# Altium PCB PCB.PcbDoc
Units mm, origin at the board's own origin, x right, y up, seen from the top; angles counter-clockwise.
Board outline 48.26 x 35.69 mm, 2 copper layers (Top Layer, Bottom Layer); 8 components, 6 nets, 21 pads, 0 vias.
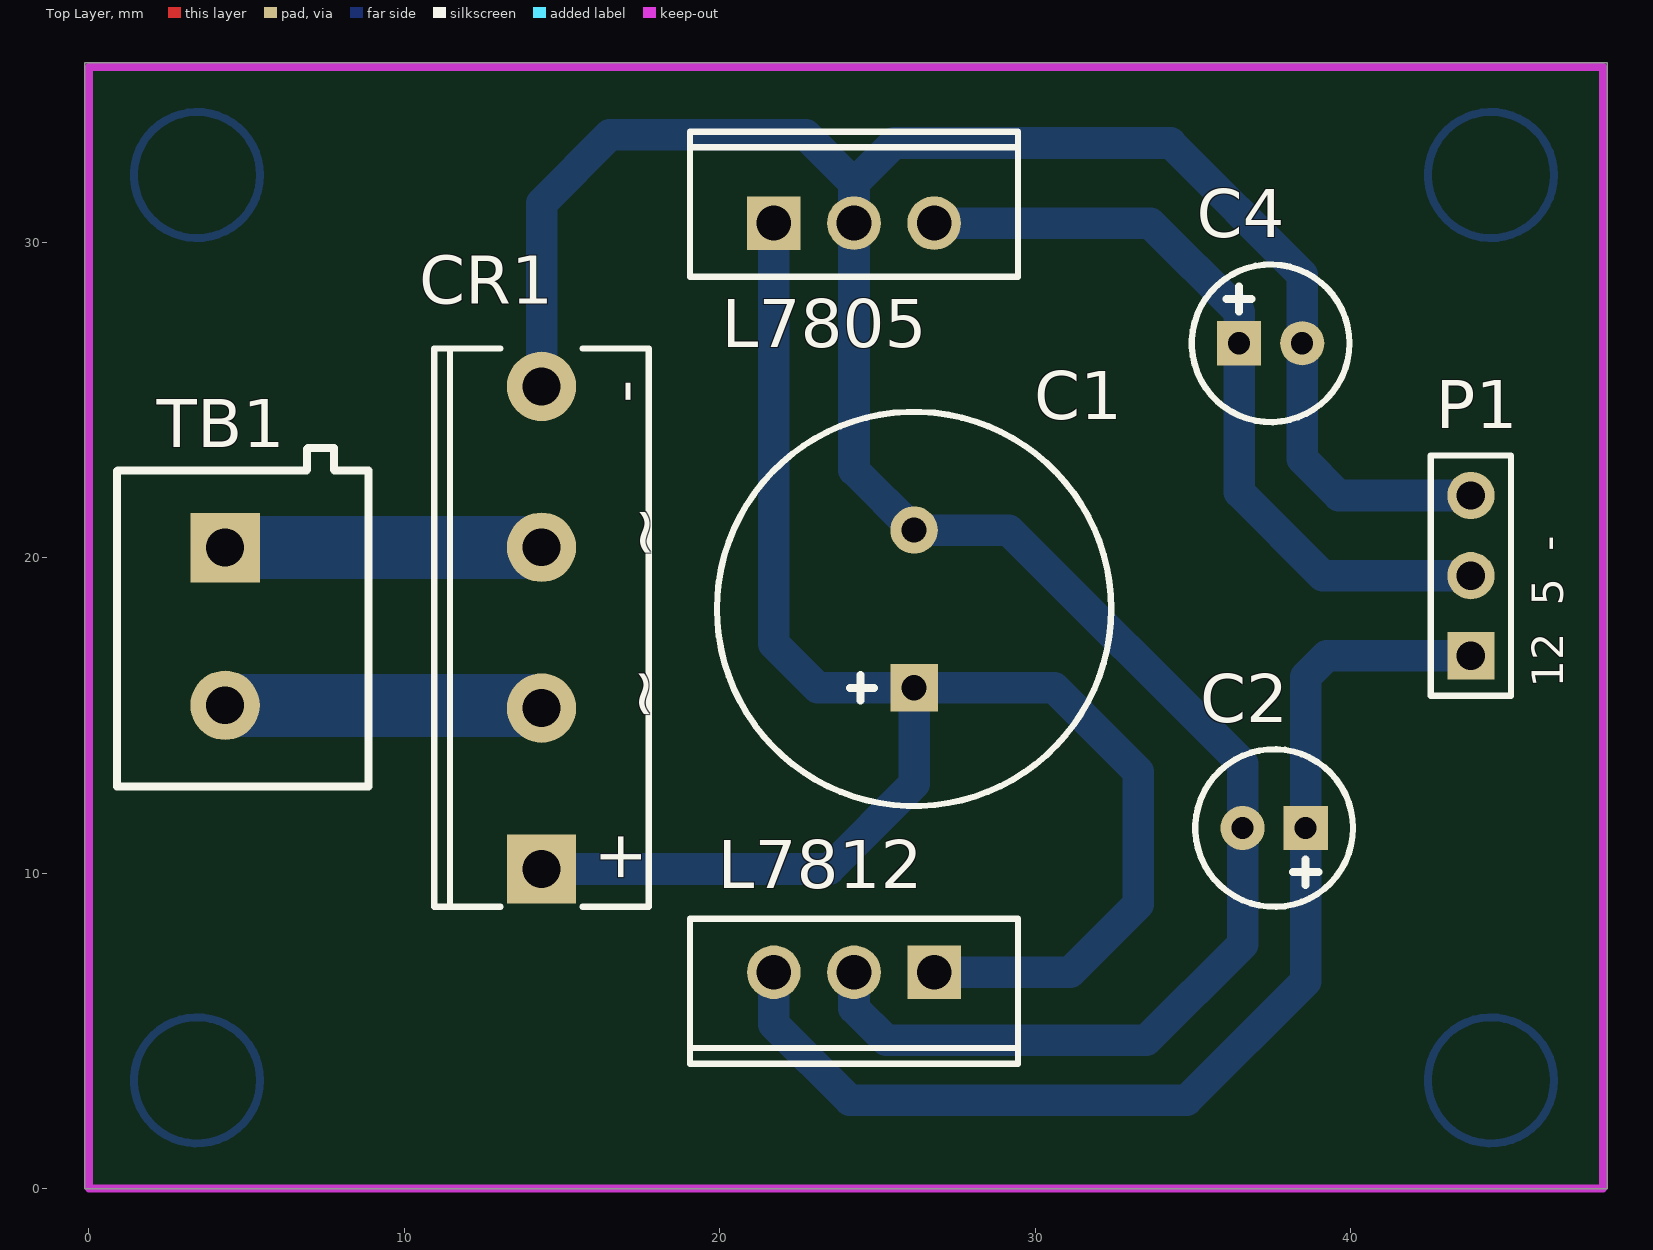
[diagram p0: Top Layer view]
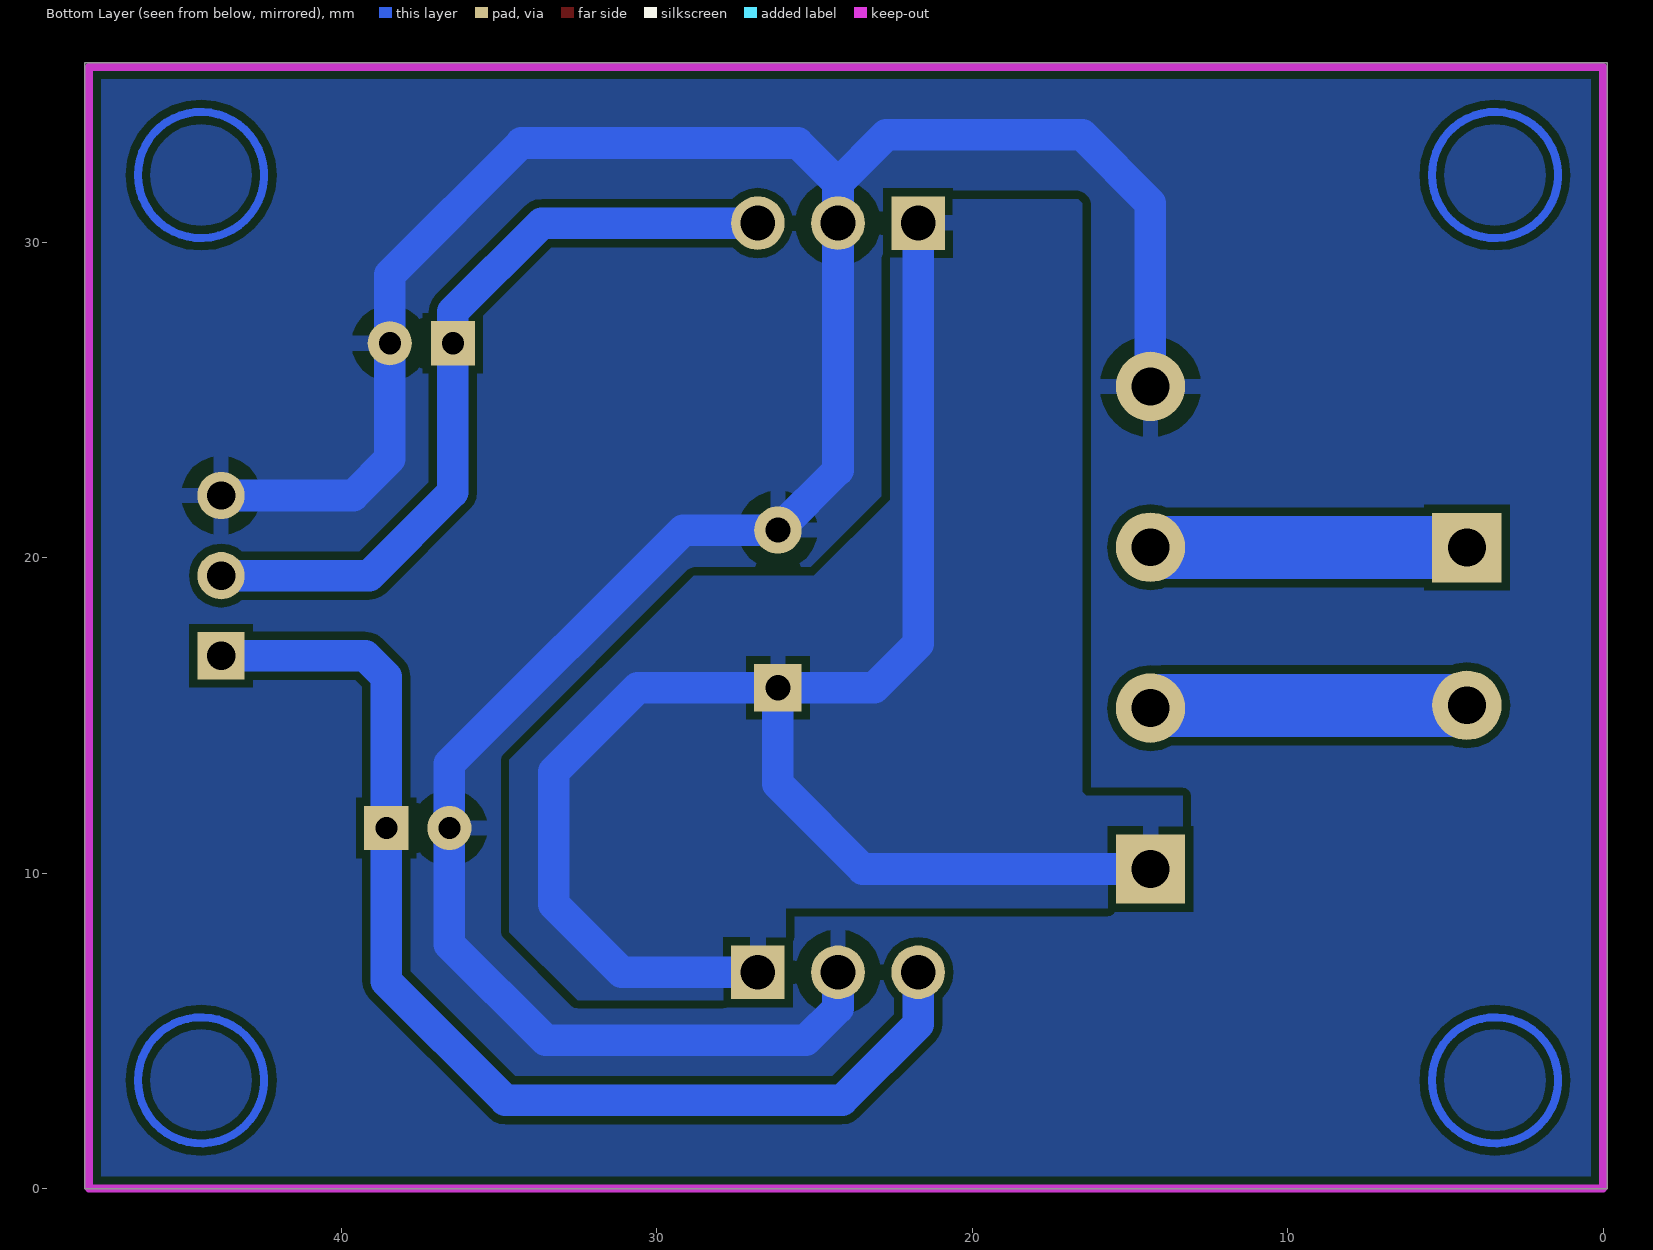
[diagram p1: Bottom Layer view, seen from below]
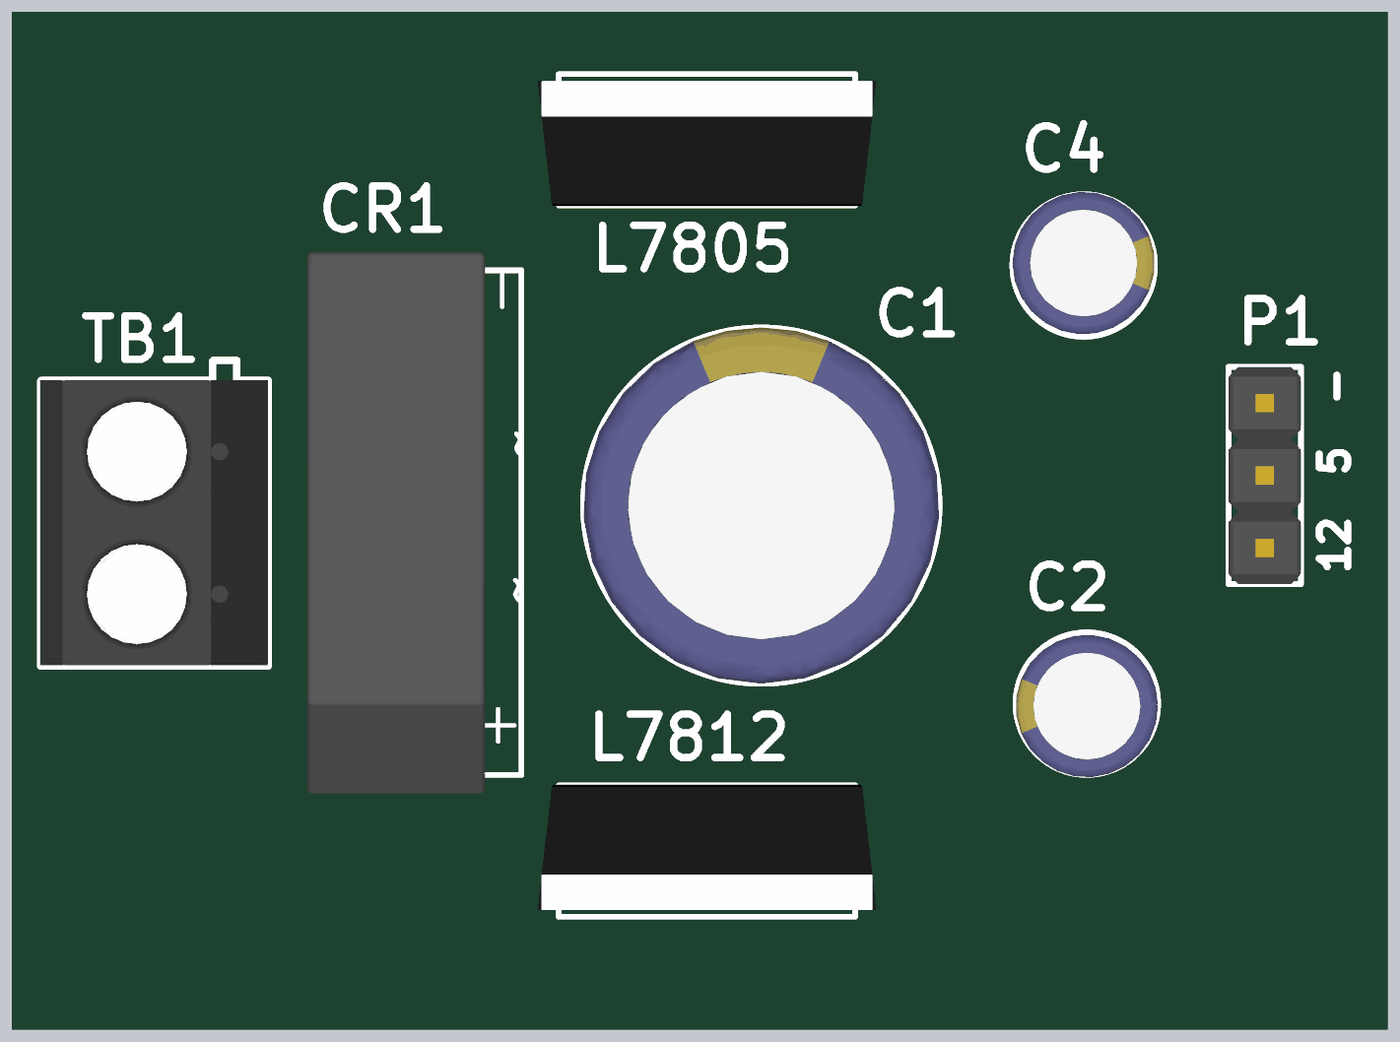
[diagram p2: 3D render of the assembled board from above, using the file's embedded part models]

## Layer stack, top to bottom
Top Solder: solder mask 0.0102, Solder Resist, Dk 3.5
Top Layer: signal copper 0.0356
Dielectric 1: dielectric 0.32, FR-4, Dk 4.8
Bottom Layer: signal copper 0.0356
Bottom Solder: solder mask 0.0102, Solder Resist, Dk 3.5

## Board outline
-0.127,0 48.133,0 48.133,35.687 -0.127,35.687

## Design rules (kind name [scope] priority, off if disabled: settings)
Clearance [All] p1: gap=0.254 ignorepadtopadclearanceinfootprint=FALSE except(0: Arc-Hole Track-Hole SMDPad-Hole THPad-Hole Via-Hole Fill-Hole Poly-Hole Region-Hole Text-Hole)
Height [All] p1: minheight=0 maxheight=35 prefheight=12.7
PlaneConnect [All] p1: planeconnectstyle=Relief reliefexpansion=0.508 reliefentries=4 reliefconductorwidth=0.5 reliefairgap=0.254
PolygonConnect [All] p1: connectstyle=Relief reliefconductorwidth=0.5 reliefentries=4 polygonreliefangle="90 Angle" airgapwidth=0.5
RoutingVias [All] p1: holewidth=0.711 width=1.27 viastyle="Through Hole" minholewidth=0.711 minwidth=1.27 maxholewidth=0.711 maxwidth=1.27
SilkToSilkClearance [All] p1: silktosilkclearance=0.1
SilkToSolderMaskClearance [IsPad] p1: minsilkscreentomaskgap=0.1 clearancetoexposedcopper=TRUE
SolderMaskExpansion [All] p1: expansion=0.102
Width [All] p1: maxlimit=5 minlimit=0.254 preferedwidth=1
26 further rules are at their usual default settings.

## Classes and differential pairs
net class L7805_Nets: 5V GND NetC1_1
net class L7812_Nets: 12V GND NetC1_1
net class TerminalBlock1_Nets: NetCR1_2 NetCR1_4
net class P1_Nets: 5V 12V GND
net class CR1_Nets: GND NetC1_1 NetCR1_2 NetCR1_4
net class C4_Nets: 5V GND
net class C2_Nets: 12V GND
net class C1_Nets: GND NetC1_1

## Components (designator, comment, footprint, x,y, rotation, side; value= is the part's Value field where it differs from the comment)
C1 "Cap Pol1" CAPPRD500W60D1250HXXX-V 26.162,18.375 r90 top value=2200uF
C2 "Cap Pol1" CAPPRD200W50D500HXXX-V 37.576,11.43 r180 top value=0.1uF
C4 "Cap Pol1" CAPPRD200W50D500HXXX-V 37.465,26.797 r0 top value=0.1uF
CR1 "KBL10" D-37 14.351,17.78 r90 top
L7805 "L7805ACV" TO220ABN 24.257,30.607 r0 top
L7812 "L7812ACV" TO220ABN 24.257,6.858 r180 top
P1 "Header 3" HDR1X3 43.815,16.891 r90 top
TB1 "Terminales" TerminalBlock 4.318,20.32 r180 top (schematic designator TerminalBlock1)

## Footprints (in the part's own frame and the unit in brackets; to place one, negate y for a bottom-side part, rotate by r counter-clockwise, add the part's x,y. Pads: shape width x height; smd on the part's side, far side on the other; paste and mask are expansions set on the pad)
CAPPRD200W50D500HXXX-V [mm]
  rect 1.4x1.4 hole 0.7: 1(-1,0)
  round 1.4 hole 0.7: 2(1,0)
  silkscreen extent -2.5,-2.5 2.5,2.5, body extent -2.5,-2.41 2.5,2.59, height 11.1
CAPPRD500W60D1250HXXX-V [mm]
  rect 1.5x1.5 hole 0.8: 1(-2.5,0)
  round 1.5 hole 0.8: 2(2.5,0)
  silkscreen extent -6.25,-6.25 6.25,6.25, body extent -6.25,-6.25 6.25,6.25, height 30.2
D-37 [mm] "SIP; 4 Leads; Body 15 x 17.5 x 6.8 mm (typ); Pitch 5.1 mm"
  rect 2.2x2.2 hole 1.2: 1(-7.65,0)
  round 2.2 hole 1.2: 2(-2.55,0) 3(2.55,0) 4(7.65,0)
  silkscreen extent -8.85,-3.4 8.85,3.4, body extent -9.5,-2.13 9.5,4.13, height 15.75
HDR1X3 [mm] "Connector; Header; 3 Position"
  rect 1.5x1.5 hole 0.9: 1(0,0)
  round 1.5 hole 0.9: 2(2.54,0) 3(5.08,0)
  silkscreen extent -1.27,-1.27 6.35,1.27, body extent -1.27,-1.27 6.35,1.27, height 9.75
TerminalBlock [mm]
  rect 2.2x2.2 hole 1.2: 1(0,0)
  round 2.2 hole 1.2: 2(0,5)
  silkscreen extent -4.55,-3.15 3.42,7.57, body extent -4.55,-2.45 3.45,7.55, height 11
TO220ABN [mm] "TO, Thru-Hole, Vertical, Heatsink Mounted; 3 In-Line Leads; Pitch 2.54 mm; Pin sequence 1, 3, 2"
  rect 1.7x1.7 hole 1.1: 1(-2.54,0)
  round 1.7 hole 1.1: 2(2.54,0) 3(0,0)
  silkscreen extent -5.2,-1.7 5.2,2.9, body extent -5.94,-1.73 5.94,2.67, height 19.11

## Part data
C1 C2 C4: "Polarized Capacitor (Radial)", LatestRevisionDate=17-Jul-2002, LatestRevisionNote="Re-released for DXP Platform.", PackageDescription="Polarized Capacitor (Radial); 2 Leads", PackageReference=RB7.6-15, Published=8-Jun-2000, Publisher="Altium Limited"
CR1: "4 Amp Rectifier Bridge", ComponentLink1Description="Manufacturer Link", ComponentLink1URL=http://www.irf.com/, ComponentLink2Description=Datasheet, ComponentLink2URL=http://www.irf.com/product-info/datasheets/data/1kab-e.pdf, DatasheetVersion=E2732B, LatestRevisionDate=17-Jul-2002, LatestRevisionNote="Re-released for DXP Platform.", PackageDescription="Bridge Rectifier; 4 Terminals; Body 9.4 x 9.4 mm (typ); Pitch 5.08 mm", PackageReference=D-38, Published=8-Jun-2000, Publisher="Altium Limited"
L7805 L7812: "Precision 1A Regulator", ComponentLink1Description="Manufacturer Link", ComponentLink1URL=http://www.st.com/, ComponentLink2Description=Datasheet, ComponentLink2URL=http://www.st.com/stonline/products/literature/ds/2144/l7805ab.pdf, DatasheetVersion=Nov-1999, LatestRevisionDate=17-Jul-2002, LatestRevisionNote="Re-released for DXP Platform.", PackageDescription="TO, Thru-Hole, Vertical, Heatsink Mounted; 3 In-Line Leads; Pitch 2.54 mm; Pin sequence 1, 3, 2", PackageReference=TO220ABN, PackageVersion=Jun-1998, Published=24-Aug-2001, Publisher="Altium Limited"
  L7805: Note="Tab is connected to pin 3 (GND)."
P1: "Header, 3-Pin", LatestRevisionDate=17-Jul-2002, LatestRevisionNote="Re-released for DXP Platform.", Publisher="Altium Limited"
TB1: library part TerminalBlock?

## Nets (pads, with @x,y where several pads share a name; then routed paths per layer and width w, separated by ;. In a path a pad name is that pad's centre, name@x,y a point inside that pad or via, vN(x,y) a via of type N, cw(c..) or ccw(c..) an arc to the next point about the centre after c; other vN are vias at no path point)
5V: C4.1 L7805.2 P1.2 | length 25
  Bottom Layer w1: L7805.2 33.655,30.607 36.465,27.797 C4.1 36.465,22.082 39.116,19.431 P1.2
12V: C2.1 L7812.2 P1.1 | length 36.2
  Bottom Layer w1: L7812.2 21.717,5.207 24.13,2.794 34.798,2.794 38.576,6.572 C2.1 38.576,16.224 39.243,16.891 P1.1
GND: C1.2 C2.2 C4.2 CR1.4 L7805.3 L7812.3 P1.3 | length 91.5
  Bottom Layer w1: CR1.4 14.351,31.242 16.51,33.401 22.733,33.401 24.257,31.877 ; L7812.3 24.257,5.715 25.273,4.699 33.528,4.699 36.576,7.747 C2.2 36.576,13.462 29.163,20.875 C1.2 24.257,22.78 L7805.3 24.257,31.877 ; P1.3 39.624,21.971 38.465,23.13 C4.2 38.465,28.972 34.29,33.147 25.527,33.147 24.257,31.877
NetC1_1: C1.1 CR1.1 L7805.1 L7812.1 | length 54.3
  Bottom Layer w1: CR1.1@14.508,10.287 CR1.1 23.465,10.13 26.162,12.827 C1.1 ; L7805.1 21.717,17.272 23.114,15.875 C1.1 ; L7812.1 31.115,6.858 33.274,9.017 33.274,13.208 30.607,15.875 C1.1
NetCR1_2: CR1.2 TB1.2 | length 10.2
  Bottom Layer w1: CR1.2@14.007,15.32 CR1.2@14.351,14.976
  Bottom Layer w2: TB1.2 CR1.2@14.007,15.32
NetCR1_4: CR1.3 TB1.1 | length 10.1
  Bottom Layer w1: CR1.3@14.107,20.32 CR1.3@14.351,20.076
  Bottom Layer w2: TB1.1 CR1.3@14.107,20.32
copper on no net: | length 50.3
  Bottom Layer w0.254: 5.429,3.429 ccw(c3.429,3.429) 5.429,3.429 ; 5.429,32.131 ccw(c3.429,32.131) 5.429,32.131 ; 46.45,3.429 ccw(c44.45,3.429) 46.45,3.429 ; 46.45,32.131 ccw(c44.45,32.131) 46.45,32.131

## Polygon pours and split planes (outlines as drawn)
NetC1_1 on Bottom Layer "1" (solid, pour order 0): 13.335,8.89 25.908,8.89 25.908,6.096 26.035,5.969 32.512,5.969 34.671,8.128 34.671,13.589 28.829,19.431 25.019,19.431 22.606,21.844 22.606,31.369 16.637,31.369 16.51,31.242 16.51,12.573 16.383,12.446 13.335,12.446
GND on Bottom Layer "GND" (solid, pour order 8): 0,0 48.006,0 48.006,35.56 0,35.56

## Keep-outs
Keep-Out Layer:
  lines w0.254: 0,0 48.006,0 48.006,35.56 0,35.56 0,0

## Silkscreen, mask and mechanical layers (free items; w line width, h text height)
Top Overlay:
  text "12  5  -" at 46.736,15.875 h1 r90

## Text inside footprints (layer, text, board x,y; h text height)
CR1: Top Overlay "-" at 17.653,24.892 h1.5 r90; Top Overlay "+" at 17.511,9.64 h1.5 r90; Top Overlay "~" at 18.251,14.81 h1.5 r90; Top Overlay "~" at 18.288,19.939 h1.5 r90